# Altium PCB NDS_TV_OUT_PCB_V1I2.PcbDoc (part 1 of 2)
Units mm, origin at the board's own origin, x right, y up, seen from the top; angles counter-clockwise.
Board outline 38 x 49 mm, 4 copper layers (L1, L2-GND, L3-PW, L4), stack 0.603 mm thick; 44 components, 33 nets, 151 pads, 52 vias.
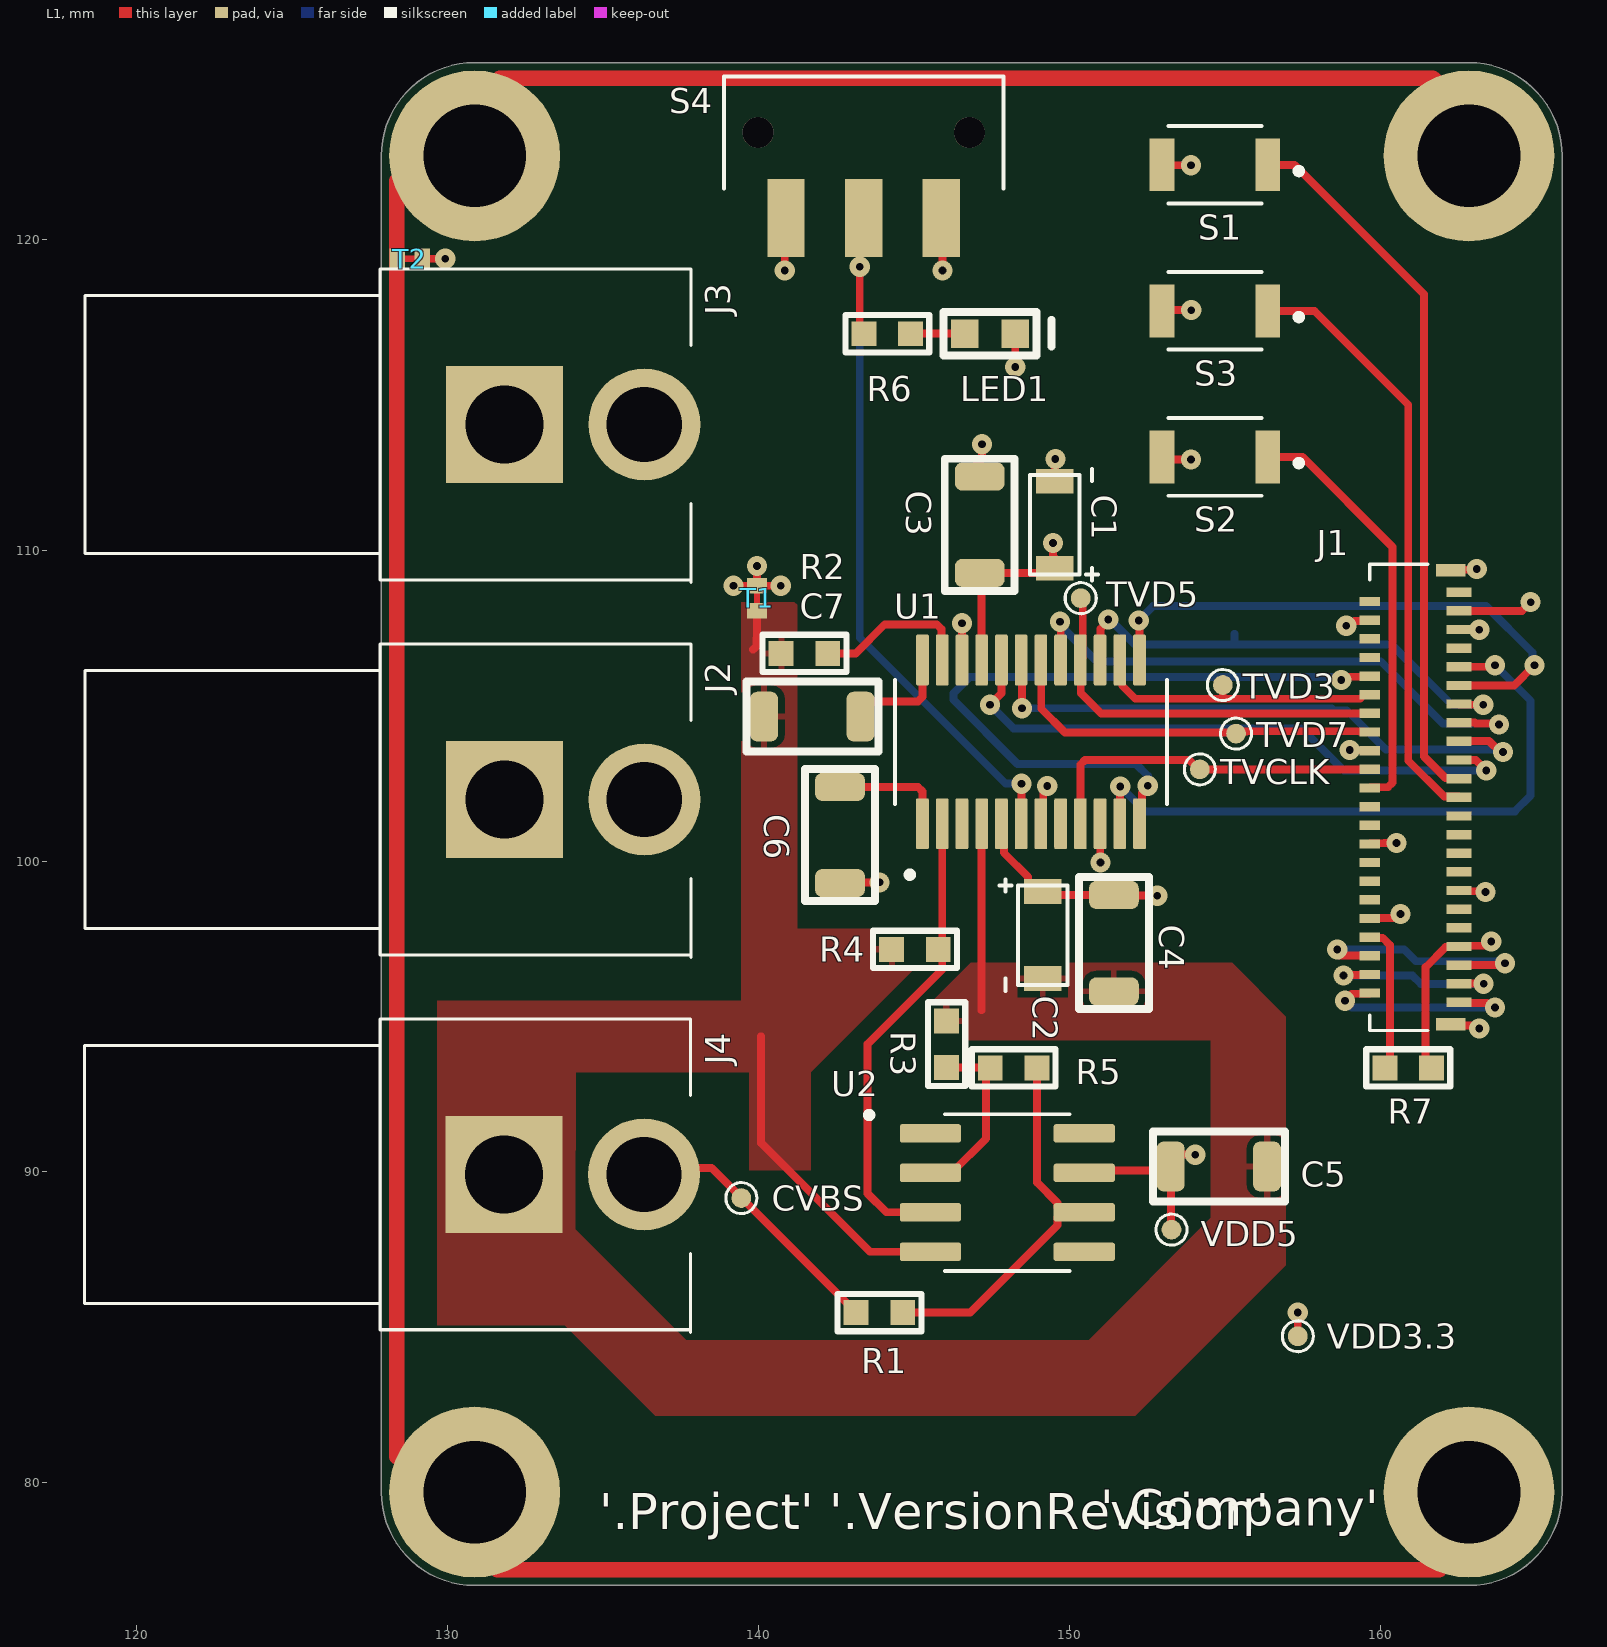
[diagram p0: L1 view]
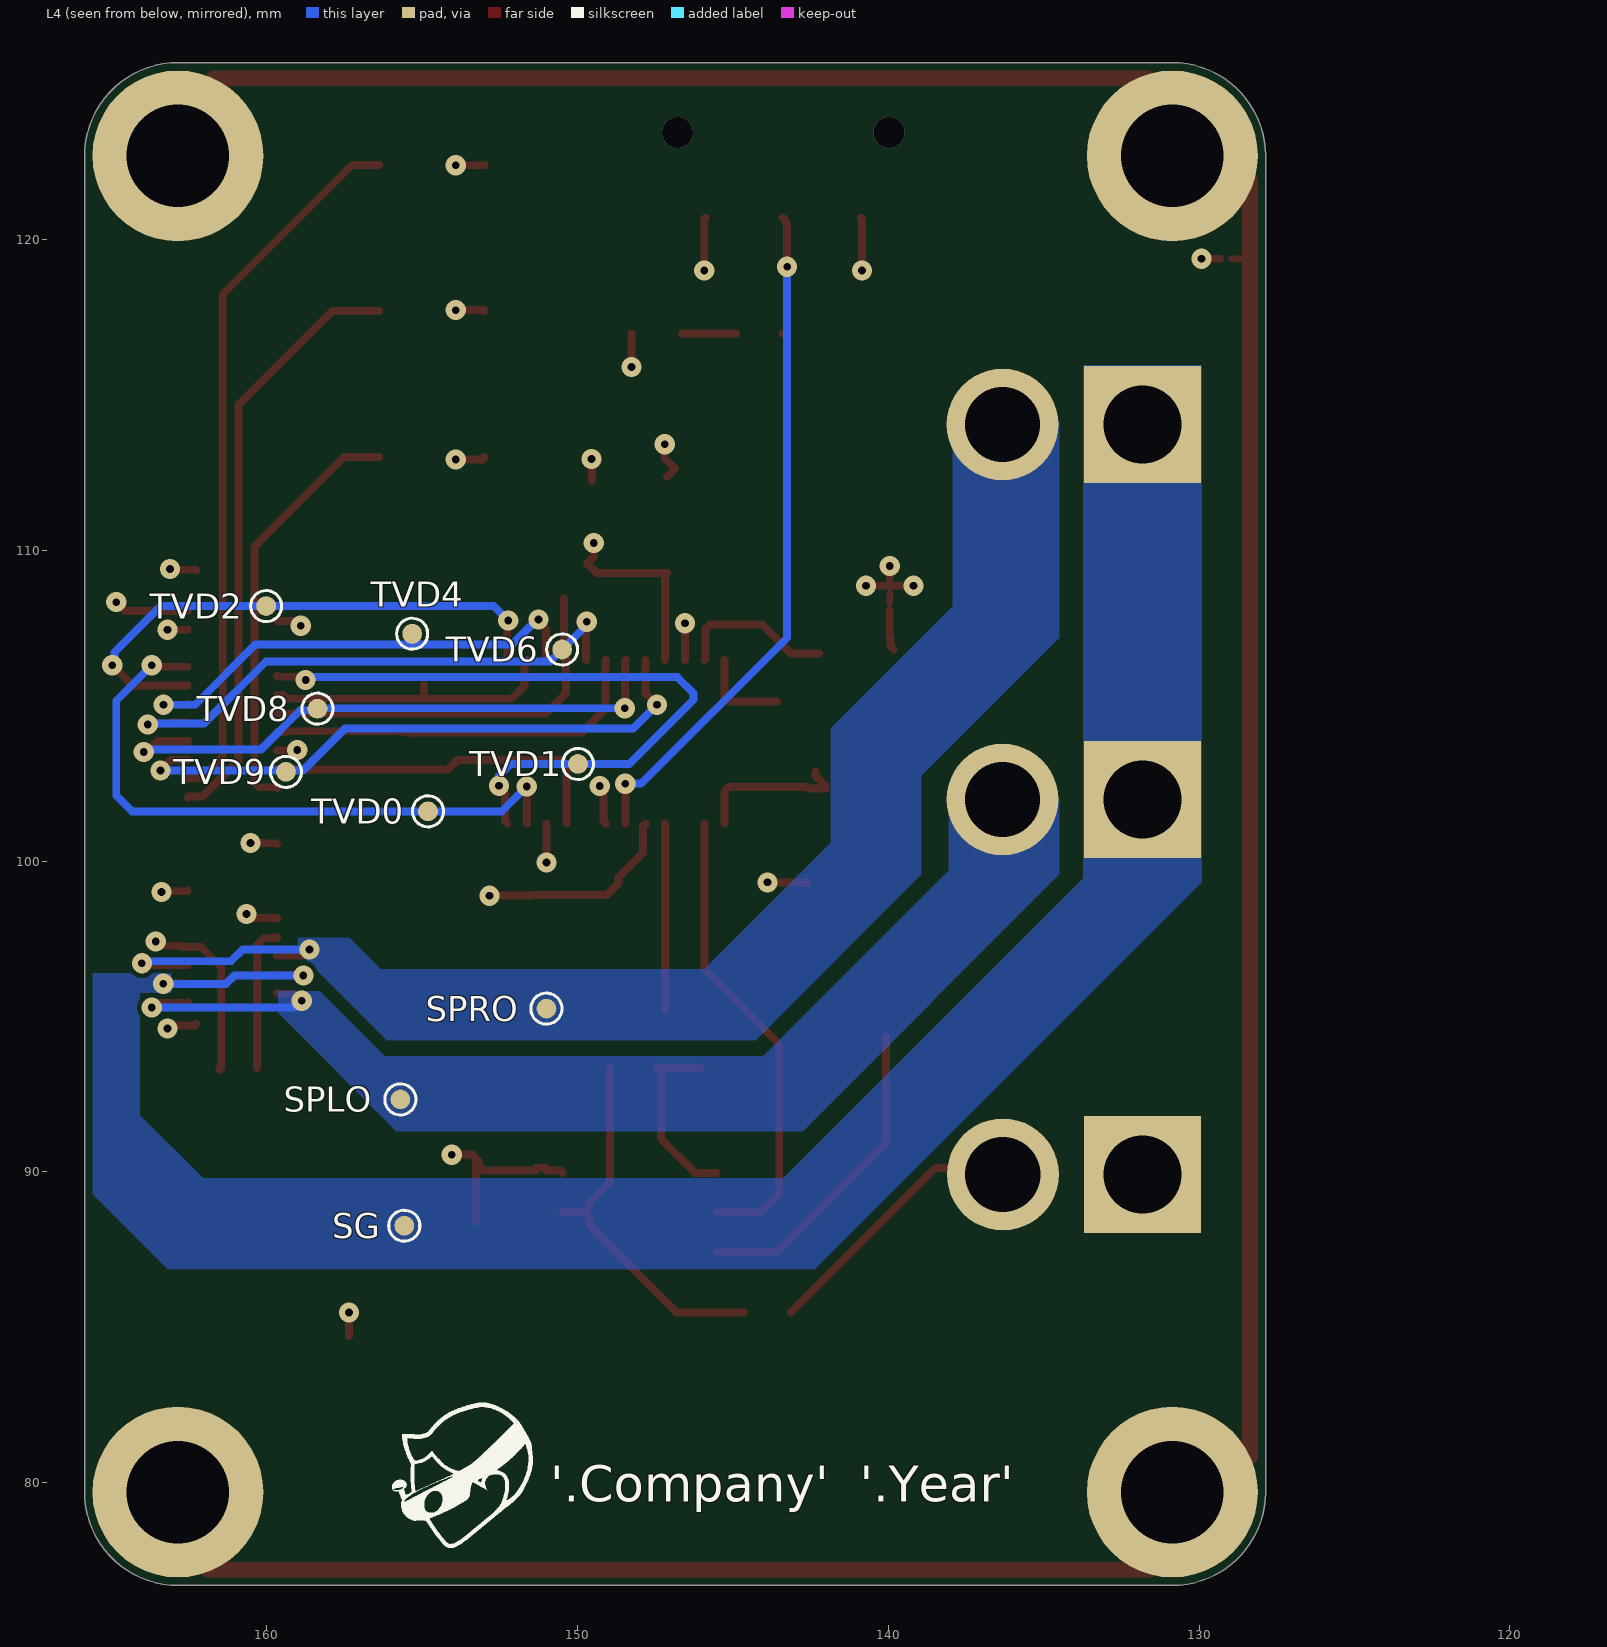
[diagram p1: L4 view, seen from below]
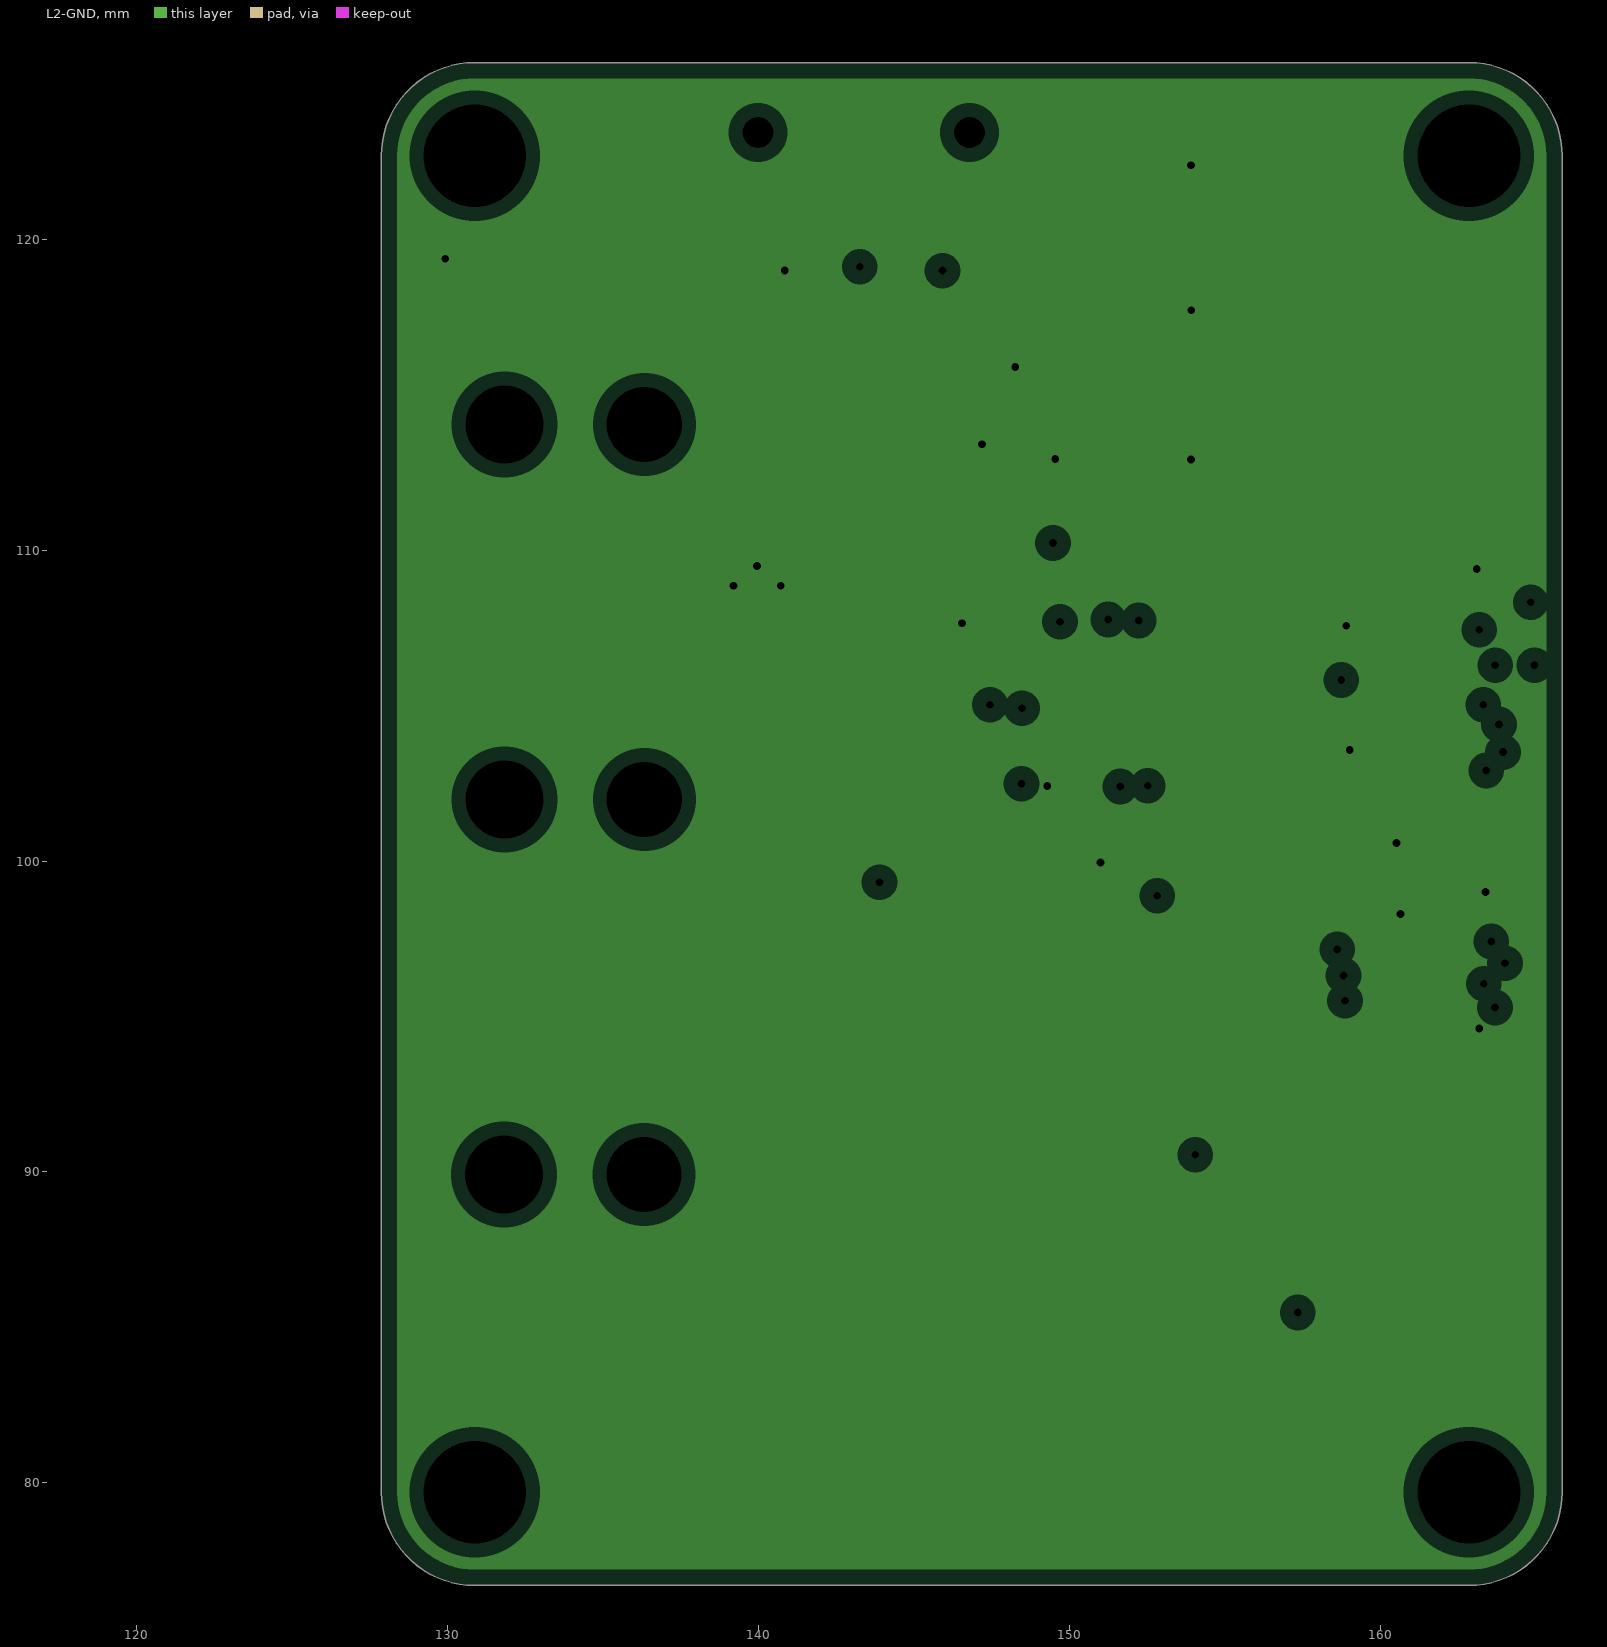
[diagram p2: L2-GND, clearances drawn from the general rule]
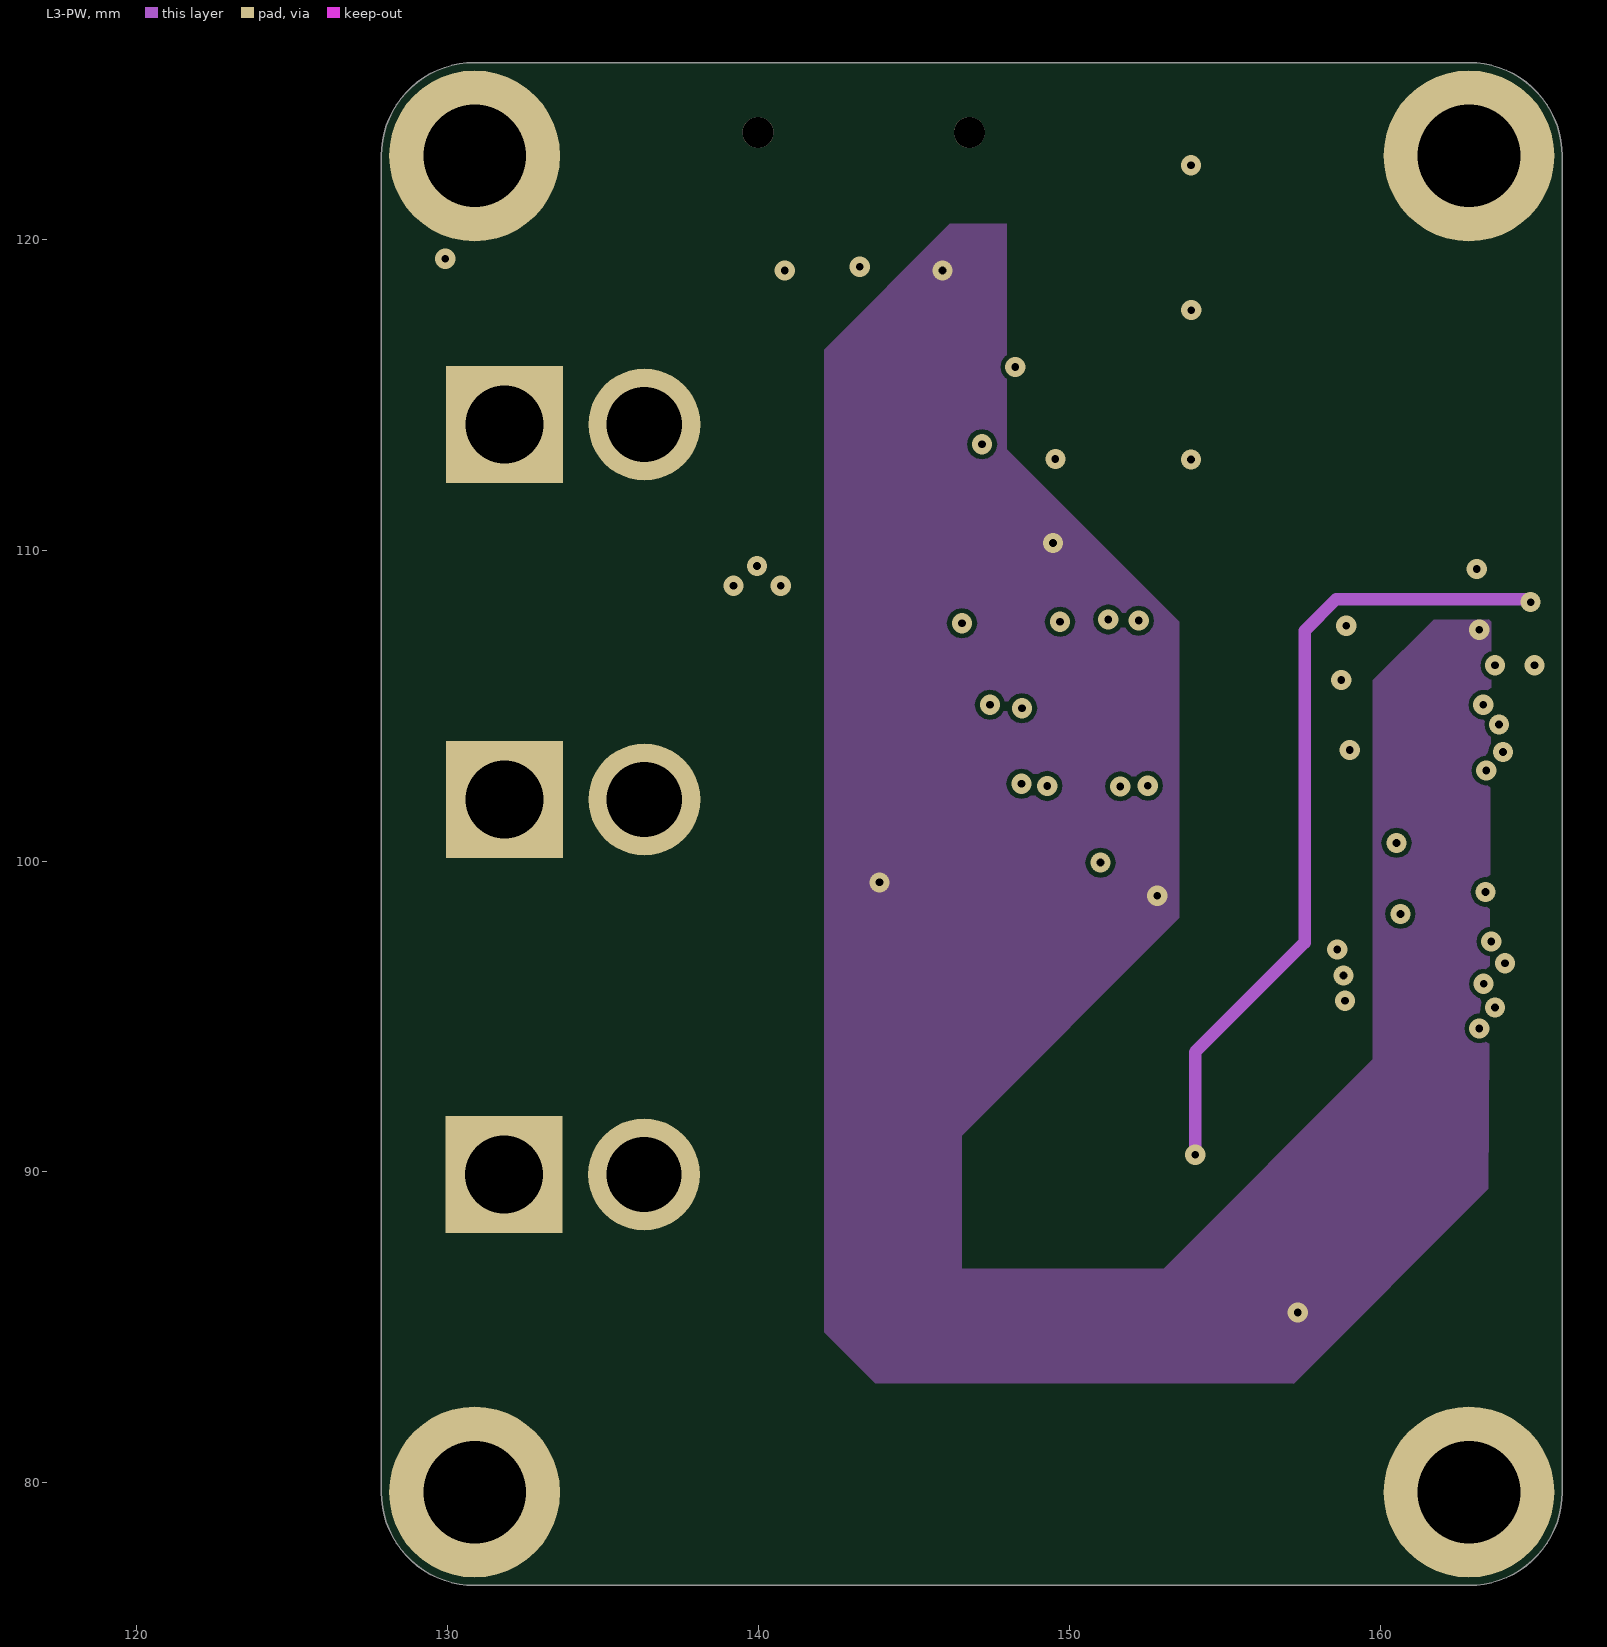
[diagram p3: L3-PW]

## Layer stack, top to bottom
Top Solder: solder mask 0.0102, Solder Resist, Dk 3.5
L1: signal copper 0.0356
Dielectric 1: prepreg 0.0711, PP-006, Dk 4.1
L2-GND: plane copper 0.035, net GND
Dielectric1: dielectric 0.32, FR-4, Dk 4.8
L3-PW: signal copper 0.035
Dielectric 2: prepreg 0.0711, PP-006, Dk 4.1
L4: signal copper 0.0356
Bottom Solder: solder mask 0.0102, Solder Resist, Dk 3.5

## Board outline
127.862,79.692 ccw(c130.862,79.692) 130.862,76.692 162.862,76.692 ccw(c162.862,79.692) 165.862,79.692 165.862,122.692 ccw(c162.862,122.692) 162.862,125.692 130.862,125.692 ccw(c130.862,122.692) 127.862,122.692

## Design rules (kind name [scope] priority, off if disabled: settings)
BoardOutlineClearance [All] p1: gap=0.25 ignorepadtopadclearanceinfootprint=FALSE except(0: Arc-SplitContinuation Track-SplitContinuation SMDPad-SplitContinuation THPad-SplitContinuation Via-SplitContinuation Fill-SplitContinuation Poly-SplitContinuation Region-SplitContinuation Text-SplitContinuation)
Clearance "Clearance poly Power Polygon" [OnLayer('L4-PWR') vs InPolygon] p1: gap=0.4 ignorepadtopadclearanceinfootprint=FALSE
Clearance Clearance-xPP-xTP-xTT [All] p2: gap=0.15 ignorepadtopadclearanceinfootprint=FALSE
ComponentClearance [All] p1: gap=0 collisioncheckmode=3 verticalgap=0 showdistances=FALSE
DiffPairsRouting DiffPairsRoutingGBE [InDifferentialPairClass('All Differential Pairs')] p1: maxlimit=0.22 minlimit=0.22 mostfreqgap=0.22 toplayer_minwidth=0.15 toplayer_maxwidth=0.15 toplayer_prefwidth=0.15 midlayer1_minwidth=0.15 midlayer1_maxwidth=0.15 midlayer1_prefwidth=0.15 bottomlayer_minwidth=0.15 bottomlayer_maxwidth=0.15 bottomlayer_prefwidth=0.15 maxuncoupledlength=1.25
Height [All] p1: minheight=0 maxheight=25 prefheight=12.5
HoleSize HoleSize-PTH [All] p1: absolutevalues=TRUE maxlimit=4 minlimit=0.15 maxpercent=80.000 minpercent=20.000
HoleToHoleClearance [All] p1: gap=0.35 allowstackedmicrovias=TRUE
MatchedLengths MatchedLengths_USB_DiffPairs_1 [InxSignalClass('USB_CHJ1_1_DL') OR InxSignalClass('USB_CHJ1_1_RX') OR InxSignalClass('USB_CHJ1_1_TX')] p1: tolerance=0.127 checknetsindiffpair=TRUE checkdiffpairvsdiffpair=FALSE checkxsignals=FALSE checkothers=FALSE
MatchedLengths MatchedLengths_USB_DiffPairs [InxSignalClass('USB_CHJ1_1_DL') OR InxSignalClass('USB_CHJ1_1_RX') OR InxSignalClass('USB_CHJ1_1_TX')] p2: tolerance=0.127 checknetsindiffpair=TRUE checkdiffpairvsdiffpair=FALSE checkxsignals=FALSE checkothers=FALSE
MatchedLengths DiffPairClass [InDifferentialPairClass('All Differential Pairs')] p3: tolerance=0.127 checknetsindiffpair=TRUE checkdiffpairvsdiffpair=FALSE checkxsignals=FALSE checkothers=FALSE
MatchedLengths MatchedLengths_GBE0 [InNetClass('GBE0')] p4: tolerance=0.127 checknetsindiffpair=FALSE checkdiffpairvsdiffpair=TRUE checkxsignals=TRUE checkothers=TRUE
MatchedLengths MatchedLengths_GBE1 [InNetClass('GBE1')] p5: tolerance=0.127 checknetsindiffpair=FALSE checkdiffpairvsdiffpair=TRUE checkxsignals=TRUE checkothers=TRUE
MatchedLengths MatchedLengths_GBE2 [InNetClass('GBE2')] p6: tolerance=0.127 checknetsindiffpair=FALSE checkdiffpairvsdiffpair=TRUE checkxsignals=TRUE checkothers=TRUE
MatchedLengths MatchedLengths_HDMI [InNetClass('HDMI')] p7: tolerance=0.127 checknetsindiffpair=FALSE checkdiffpairvsdiffpair=TRUE checkxsignals=TRUE checkothers=TRUE
MatchedLengths MatchedLengths_USB-GBE [InNetClass('USB-GBE')] p8: tolerance=0.127 checknetsindiffpair=FALSE checkdiffpairvsdiffpair=TRUE checkxsignals=TRUE checkothers=TRUE
MatchedLengths MatchedLengths_USB3 [InNetClass('USB3')] p9: tolerance=0.127 checknetsindiffpair=FALSE checkdiffpairvsdiffpair=TRUE checkxsignals=TRUE checkothers=TRUE
MatchedLengths MatchedLengths_USB2 [InNetClass('USB2')] p10: tolerance=0.127 checknetsindiffpair=FALSE checkdiffpairvsdiffpair=TRUE checkxsignals=TRUE checkothers=TRUE
MinimumAnnularRing "Minimum IAR  >0.45mm" [((ObjectKind = 'Pad') OR (ObjectKind = 'Via')) And (Layer = 'MultiLayer') And (HoleDiameter > AsMM(0.45))] p1: minimumring=0.175 // minimum inner annular ring for pads > 0.45mm finished hole size
MinimumAnnularRing "Minimum IAR <=0.45mm" [((ObjectKind = 'Pad') OR (ObjectKind = 'Via')) And (Layer = 'MultiLayer') And (HoleDiameter <= AsMM(0.45))] p2: minimumring=0.175 // minimum inner annular ring for pads <= 0.45mm finished hole size
MinimumSolderMaskSliver [All] p1: minsoldermaskwidth=0.08
PlaneClearance PlaneClearance-IPI [All] p1: clearance=0.45
PlaneConnect PlaneConnect_PWR [InNetClass('PWR')] p1: planeconnectstyle=Direct reliefexpansion=0.175 reliefentries=2 reliefconductorwidth=0.2 reliefairgap=0.2
PlaneConnect PlaneConnect_VIA [IsVia] p2: planeconnectstyle=Direct reliefexpansion=0.175 reliefentries=4 reliefconductorwidth=0.2 reliefairgap=0.2
PlaneConnect [All] p3: planeconnectstyle=Relief reliefexpansion=0.2 reliefentries=4 reliefconductorwidth=0.25 reliefairgap=0.2
PolygonConnect PolygonConnect_VIA [HasFootprint('NET_TIE')] p1: connectstyle=Direct reliefconductorwidth=0.2 reliefentries=4 polygonreliefangle="90 Angle" airgapwidth=0.2
PolygonConnect PolygonConnect_SMD [Not HasFootprint('NET_TIE') and InNet('AGND')] p2: thpad.connectstyle=Direct thpad.reliefconductorwidth=0.2 thpad.reliefentries=4 thpad.polygonreliefangle="90 Angle" thpad.airgapwidth=0.2 smdpad.connectstyle=Relief smdpad.reliefconductorwidth=0.2 smdpad.reliefentries=4 smdpad.polygonreliefangle="90 Angle" smdpad.airgapwidth=0.2 via.connectstyle=Direct via.reliefconductorwidth=0.2 via.reliefentries=4 via.polygonreliefangle="90 Angle" via.airgapwidth=0.2
PolygonConnect PolygonConnect_VIA_1 [All] p3: connectstyle=Direct reliefconductorwidth=0.2 reliefentries=4 polygonreliefangle="90 Angle" airgapwidth=0.2
PolygonConnect [All] p4: connectstyle=Relief reliefconductorwidth=0.25 reliefentries=4 polygonreliefangle="90 Angle" airgapwidth=0.2
RoutingCorners [All] p1: cornerstyle=45-Degree minsetback=2.5 maxsetback=2.5
RoutingVias "RoutingVias > 0.45mm" [(ObjectKind = 'Via') And (HoleDiameter > AsMM(0.45))] p1: holewidth=0.5 width=0.85 viastyle="Through Hole" minholewidth=0.5 minwidth=0.85 maxholewidth=0.9 maxwidth=1.25 // finishet hole size > 0.45mm
RoutingVias "RoutingVias <= 0.45mm" [(ObjectKind = 'Via') And (HoleDiameter <= AsMM(0.45))] p2: holewidth=0.2 width=0.55 viastyle="Through Hole" minholewidth=0.15 minwidth=0.5 maxholewidth=0.45 maxwidth=0.8 // finishet hole size <= 0.45mm
SilkToSilkClearance [All] p1: silktosilkclearance=0.1
SilkToSolderMaskClearance SilkscreenOverComponentPads [IsPad] p1: minsilkscreentomaskgap=0.1 clearancetoexposedcopper=TRUE
SolderMaskExpansion [All] p1: expansion=0 istentingtop=FALSE
UnRoutedNet [All] p1: checkbadconnections=TRUE
Width Width-xTW [All] p1: maxlimit=5 minlimit=0.125 preferedwidth=0.15
Width Width-GigaE [All] p2: maxlimit=0.15 minlimit=0.15 preferedwidth=0.15
Width Width-Power [InNetClass('PWR')] p3: maxlimit=5 minlimit=0.2 preferedwidth=0.25
18 further rules are at their usual default settings.

## Classes and differential pairs
component class "[05] - BUTTONS AND SWITCHES": LED1 R7 S1 S2 S3 S4
component class "[04] - CONNECTORS": J1 J2 J3 J4 SG SPLO SPRO T1 T2 TVCLK TVD0 TVD1 TVD2 TVD3 TVD4 TVD5 TVD6 TVD7 TVD8 TVD9 VDD3.3 VDD5
component class "[03] - DAC": C1 C2 C3 C4 C7 CVBS R3 U1 U2

## Components (designator, comment, footprint, x,y, rotation, side; value= is the part's Value field where it differs from the comment)
C1 "10uF" C1206T 150.33,109.223 r90 top
C2 "10uF" C1206T 148.349,99.215 r270 top
C3 "0.1uF" C1206 147.117,110.82 r270 top
C4 "0.1uF" C1206 151.435,97.358 r90 top
C5 "0.1uF" C1206 154.813,90.17 r180 top
C6 "0.1uF" C1206 142.621,100.838 r90 top
C7 "0.1uF" C1206 141.732,104.648 r0 top
CVBS "TP_25MILC" TP_25C 139.446,89.154 r90 top
J1 "4-2328724-5" 423287245 161.106,102.051 r90 top
J2 "KLPX-0848A-2-W" KLPX0848A2W 131.826,101.981 r0 top
J3 "KLPX-0848A-2-R" KLPX0848A2R 131.826,114.046 r0 top
J4 "KLPX-0848A-2-Y" KLPX0848A2Y 131.815,89.916 r0 top
LED1 "APTD1608LZGCK" RESC0603X55N 147.447,116.967 r180 top
R1 "75R" R0603 143.891,85.471 r180 top
R2 "DNP" R0603 141.478,106.68 r0 top
R3 "430R" R0603 146.05,94.107 r270 top
R4 "DNP" R0603 145.034,97.155 r0 top
R5 "1K" R0603 148.209,93.345 r0 top
R6 "320R" R0603 144.145,116.967 r180 top
R7 "1K" R0603 160.909,93.345 r0 top
S1 "B3U-1000P" SW_B3U-1000P 154.686,122.404 r180 top
S2 "B3U-1000P" SW_B3U-1000P 154.686,113.006 r180 top
S3 "B3U-1000P" SW_B3U-1000P 154.686,117.705 r180 top
S4 "JS102011SAQN" SW_JS102011SAQN 143.383,123.444 r180 top
SG "TP_25MILC" TP_25C 155.575,88.265 r90 bottom
SPLO "TP_25MILC" TP_25C 155.702,92.329 r90 bottom
SPRO "TP_25MILC" TP_25C 151.003,95.25 r90 bottom
T1 "NET TIE" NET_TIE 139.954,108.458 r90 top net-tie
T2 "NET TIE" NET_TIE 128.778,119.38 r0 top net-tie
TVCLK "TP_25MILC" TP_25C 154.2,102.951 r90 top
TVD0 "TP_25MILC" TP_25C 154.813,101.6 r90 bottom
TVD1 "TP_25MILC" TP_25C 149.987,103.124 r90 bottom
TVD2 "TP_25MILC" TP_25C 160.02,108.204 r90 bottom
TVD3 "TP_25MILC" TP_25C 154.94,105.664 r90 top
TVD4 "TP_25MILC" TP_25C 155.321,107.315 r90 bottom
TVD5 "TP_25MILC" TP_25C 150.368,108.458 r90 top
TVD6 "TP_25MILC" TP_25C 150.495,106.807 r90 bottom
TVD7 "TP_25MILC" TP_25C 155.366,104.1 r90 top
TVD8 "TP_25MILC" TP_25C 158.369,104.902 r90 bottom
TVD9 "TP_25MILC" TP_25C 159.385,102.87 r90 bottom
U1 "MAX5184BEEG+" SOP63P602X175-24N 148.768,103.835 r90 top
U2 "MAX4414ESA+" SOIC127P600X175-8N 148.006,89.332 r0 top
VDD3.3 "TP_25MILC" TP_25C 157.353,84.709 r90 top
VDD5 "TP_25MILC" TP_25C 153.289,88.138 r90 top

## Footprints (in the part's own frame and the unit in brackets; to place one, negate y for a bottom-side part, rotate by r counter-clockwise, add the part's x,y. Pads: shape width x height; smd on the part's side, far side on the other; paste and mask are expansions set on the pad)
423287245 [mm]
  rect 0.3x0.8 smd: 1(-6.6,-1.438) 3(-6,-1.438) 5(-5.4,-1.438) 7(-4.8,-1.438) 9(-4.2,-1.438) 11(-3.6,-1.438) 13(-3,-1.438) 15(-2.4,-1.438) 17(-1.8,-1.438) 19(-1.2,-1.438) 21(-0.6,-1.438) 23(0,-1.438) 25(0.6,-1.438) 27(1.2,-1.438) 29(1.8,-1.438) 31(2.4,-1.438) 33(3,-1.438) 35(3.6,-1.438) 37(4.2,-1.438) 39(4.8,-1.438) 41(5.4,-1.438) 43(6,-1.438) 45(6.6,-1.438)
  rect 0.3x0.65 smd: 2(-6.3,1.438) 4(-5.7,1.438) 6(-5.1,1.438) 8(-4.5,1.438) 10(-3.9,1.438) 12(-3.3,1.438) 14(-2.7,1.438) 16(-2.1,1.438) 18(-1.5,1.438) 20(-0.9,1.438) 22(-0.3,1.438) 24(0.3,1.438) 26(0.9,1.438) 28(1.5,1.438) 30(2.1,1.438) 32(2.7,1.438) 34(3.3,1.438) 36(3.9,1.438) 38(4.5,1.438) 40(5.1,1.438) 42(5.7,1.438) 44(6.3,1.438)
  rect 0.4x0.95 smd: 46(-7.3,-1.163) 47(7.3,-1.163)
  silkscreen extent -7.5,-0.44 7.5,1.44, body extent -7.5,-1.9 7.5,1.58, height 1
C1206 [mm]
  rrect50% 0.9x1.6 smd: 1(-1.55,0) 2(1.55,0)
  silkscreen extent -2.12,-1.12 2.12,1.12, body extent -1.6,-0.8 1.6,0.8, height 1
C1206T [mm]
  rect 0.8x1.2 smd: 1(0.2,0.8) 2(3,0.8)
  silkscreen extent -0.2,-0.6 3.4,1.6, body extent 0,0.03 3.2,1.63, height 1.8
KLPX0848A2R [mm]
  rect 3.765x3.765 hole 2.51: 1(0,0)
  round 3.6 hole 2.42: 2(4.5,0)
  silkscreen extent -13.5,-5.08 6,5, body extent -13.57,-5 6.03,5, height 13
KLPX0848A2W [mm]
  rect 3.765x3.765 hole 2.51: 1(0,0)
  round 3.6 hole 2.42: 2(4.5,0)
  silkscreen extent -13.5,-5.08 6,5, body extent -13.57,-5 6.03,5, height 13.06
KLPX0848A2Y [mm]
  rect 3.765x3.765 hole 2.51: 1(0,0)
  round 3.6 hole 2.42: 2(4.5,0)
  silkscreen extent -13.5,-5.08 6,5, body extent -13.56,-5 6.04,5, height 13
NET_TIE [mm]
  rect 0.5x0.65 smd paste-1 mask+0.102: 1(-0.4,0) 2(0.4,0)
  L1 lines w0.2: -0.175,0 0.175,0
R0603 [mm]
  rect 0.8x0.8 smd: 1(-0.75,0) 2(0.75,0)
  silkscreen extent -1.35,-0.6 1.35,0.6, body extent -0.8,-0.42 0.8,0.44, height 0.95
RESC0603X55N [mm]
  rect 0.89x0.93 smd: 1(-0.814,0) 2(0.814,0)
  silkscreen extent -1.97,-0.7 1.5,0.7, body extent -0.8,-0.4 0.8,0.4, height 0.95
SOIC127P600X175-8N [mm]
  rrect25% 1.97x0.59 smd: 1(-2.475,1.905) 2(-2.475,0.635) 3(-2.475,-0.635) 4(-2.475,-1.905) 5(2.475,-1.905) 6(2.475,-0.635) 7(2.475,0.635) 8(2.475,1.905)
  silkscreen extent -4.54,-2.52 2,2.59, body extent -3.08,-2.44 2.92,2.46, height 1.75
SOP63P602X175-24N [mm]
  rrect25% 1.64x0.41 smd: 1(-2.635,3.492) 2(-2.635,2.857) 3(-2.635,2.222) 4(-2.635,1.587) 5(-2.635,0.952) 6(-2.635,0.317) 7(-2.635,-0.318) 8(-2.635,-0.953) 9(-2.635,-1.588) 10(-2.635,-2.222) 11(-2.635,-2.857) 12(-2.635,-3.492) 13(2.635,-3.492) 14(2.635,-2.857) 15(2.635,-2.222) 16(2.635,-1.587) 17(2.635,-0.952) 18(2.635,-0.317) 19(2.635,0.318) 20(2.635,0.953) 21(2.635,1.588) 22(2.635,2.222) 23(2.635,2.857) 24(2.635,3.492)
  silkscreen extent -4.37,-4.37 1.99,4.37, body extent -2.97,-4.33 3.05,4.32, height 1.75
SW_B3U-1000P [mm]
  rect 0.8x1.7 smd: 1(-1.7,0) 2(1.7,0)
  silkscreen extent -2.8,-1.25 1.5,1.25, body extent -2.02,-1.27 1.98,1.23, height 1.75
SW_JS102011SAQN [mm]
  rect 1.2x2.5 smd: 1(-2.5,2.75) 2(0,2.75) 3(2.5,2.75)
  round 1 hole 1 unplated: ""(-3.4,0) ""(3.4,0)
  silkscreen extent -4.5,-1.8 4.5,1.8, body extent -4.5,-3.81 4.5,3.69, height 3.52
TP_25C [mm]
  round 0.635 smd paste-0.635 mask+0.051: 1(0,0)
  silkscreen extent -0.5,-0.5 0.5,0.5

## Part data
C1 C2: library part T491A106K010AT, "CAPACITOR, CASE A, 10UF, 10V; Product Range:KEMET - T491 Series; Capacitance:10µF; Capacitance Tolerance:± 10%; Voltage Rating:10V; Capacitor Case Style:1206 [3216 Metric]; Manufacturer Size Code:A; Operating Temperature Max:125°C; ;RoHS Compliant: Yes", Case Code (Imperial)=1206, Case Code (Metric)=3216, Dielectric Material=Tantalum, ESR (Equivalent Series Resistance)=4R, Leakage Current=1uA, Manufacturer=KEMET, Max Operating Temperature=125°C, Min Operating Temperature=-55°C, Package Quantity=2000, Ripple Current=137mA, Supplier Part Number 1=80-T491A106K010, Tolerance=10%, Voltage=10V, Capacitance=10uF, Case/Package=1206, Category="Tantalum Capacitors", ComponentLink1Description=https://datasheet.ciiva.com/257/kem-t2005-t491-257584.pdf?src-supplier=Digi-Key, ComponentLink1URL=https://datasheet.ciiva.com/257/kem-t2005-t491-257584.pdf?src-supplier=Digi-Key, ComponentLink2Description=https://datasheet.ciiva.com/11793/0900766b80718482-11793106.pdf?src-supplier=RSComponents, ComponentLink2URL=https://datasheet.ciiva.com/11793/0900766b80718482-11793106.pdf?src-supplier=RSComponents, ComponentLink3Description=https://datasheet.ciiva.com/7668/1732743-7668006.pdf?src-supplier=Element14, ComponentLink3URL=https://datasheet.ciiva.com/7668/1732743-7668006.pdf?src-supplier=Element14, ComponentLink4Description=https://datasheet.ciiva.com/20171/458293-da-en-01-20171903.pdf?src-supplier=Rapid+Electronics, ComponentLink4URL=https://datasheet.ciiva.com/20171/458293-da-en-01-20171903.pdf?src-supplier=Rapid+Electronics, ComponentLink5Description=https://datasheet.ciiva.com/27052/1573249-27052559.pdf?src-supplier=Jameco, ComponentLink5URL=https://datasheet.ciiva.com/27052/1573249-27052559.pdf?src-supplier=Jameco, ComponentLink6Description=https://datasheet.ciiva.com/257/kem-t2005-t491-257585.pdf?src-supplier=Digi-Key, ComponentLink6URL=https://datasheet.ciiva.com/257/kem-t2005-t491-257585.pdf?src-supplier=Digi-Key, ComponentLink7Description=https://datasheet.ciiva.com/257/kem-t2005-t491-257586.pdf?src-supplier=Digi-Key, ComponentLink7URL=https://datasheet.ciiva.com/257/kem-t2005-t491-257586.pdf?src-supplier=Digi-Key, ComponentLink8Description=https://datasheet.ciiva.com/7668/1854511-7668005.pdf?src-supplier=Element14, ComponentLink8URL=https://datasheet.ciiva.com/7668/1854511-7668005.pdf?src-supplier=Element14, ComponentLink9Description=https://datasheet.ciiva.com/7668/1854511-7668007.pdf?src-supplier=Element14, ComponentLink9URL=https://datasheet.ciiva.com/7668/1854511-7668007.pdf?src-supplier=Element14, ComponentLink10Description=https://datasheet.ciiva.com/7668/1446014-7668008.pdf?src-supplier=Element14, ComponentLink10URL=https://datasheet.ciiva.com/7668/1446014-7668008.pdf?src-supplier=Element14, ComponentLink11Description=https://datasheet.ciiva.com/12882/kem-t2005-t491-12882826.pdf?src-supplier=Mouser, ComponentLink11URL=https://datasheet.ciiva.com/12882/kem-t2005-t491-12882826.pdf?src-supplier=Mouser, ComponentLink12Description=https://datasheet.ciiva.com/7668/kem-t2005-t491-7668139.pdf?src-supplier=Element14, ComponentLink12URL=https://datasheet.ciiva.com/7668/kem-t2005-t491-7668139.pdf?src-supplier=Element14, ComponentLink13Description=https://datasheet.ciiva.com/14586/70095774-14586699.pdf?src-supplier=Allied+Electronics, ComponentLink13URL=https://datasheet.ciiva.com/14586/70095774-14586699.pdf?src-supplier=Allied+Electronics, ComponentLink14Description=https://datasheet.ciiva.com/14596/70095774-14596972.pdf?src-supplier=Allied+Electronics, ComponentLink14URL=https://datasheet.ciiva.com/14596/70095774-14596972.pdf?src-supplier=Allied+Electronics, ComponentLink15Description=https://datasheet.ciiva.com/29244/458293-da-01-en-kondensator-10uf-3216-10pr-10v-85c-29244583.pdf?src-supplier=Conrad, ComponentLink15URL=https://datasheet.ciiva.com/29244/458293-da-01-en-kondensator-10uf-3216-10pr-10v-85c-29244583.pdf?src-supplier=Conrad, Depth=1.6mm, Dissipation Factor=6%, Features="General Purpose", Height=1.6mm, Height - Seated (Max)=0.071inch, Lead Free="Lead Free", Length=3.2mm, Life (Hours)=2000Hour, Manufacturer Part Number=T491A106K010AT, Mount="Surface Mount,PCB", Packaging="Tape and Reel", Polarity=Polar, Pricing 1="1=0,33000, 10=0,16200, 50=0,16200, 100=0,13900, 1000=0,08800, 10000=0,06100 (USD)", REACH SVHC="No SVHC", RoHS=Yes, Supplier 1=Mouser, Termination=SMD/SMT, Voltage Rating=10V, Voltage Rating (DC)=10V, Width=0.063inch
C3 C4 C5 C6 C7: library part GRM319R71H104KA01D, "MURATA - GRM319R71H104KA01D - COND, CERÁ MULT, X7R, 100NF, 50V, 1206", Manufacturer=MURATA, Supplier Part Number 1=1828956, ComponentLink1Description=http://www.farnell.com/datasheets/2048709.pdf, ComponentLink1URL=http://www.farnell.com/datasheets/2048709.pdf, ComponentLink2Description=http://www.farnell.com/datasheets/2006461.pdf, ComponentLink2URL=http://www.farnell.com/datasheets/2006461.pdf, Manufacturer Part Number=GRM319R71H104KA01D, Pricing 1="10=0,0548, 100=0,0373, 500=0,0298, 1000=0,0271, 2000=0,0248, 4000=0,0231, 20000=0,0213, 40000=0,0209 (EUR)", RoHS=YES, Stock 1=24194, Supplier 1=Farnell, Supplier 2=Digi-Key, Supplier Part Number 2=490-1775-1-ND
CVBS SG SPLO SPRO TVCLK TVD0 TVD1 TVD2 TVD3 TVD4 TVD5 TVD6 TVD7 TVD8 TVD9 VDD3.3 VDD5: "Test Point 25mil"
J1: "FPC Connector; 0.3mm pitch front flip FPC; 45pos", Current Rating=500mA, Flammability Rating="UL94 V-0", Housing Color=Natural, Manufacturer="TE Connectivity AMP", Max Operating Temperature=85°C, Min Operating Temperature=-40°C, Supplier Part Number 1=2946027, Voltage Rating=30V, Actuator Material=Thermoplastic, Category="FFC / FPC", ComponentLink1Description=https://www.te.com/commerce/DocumentDelivery/DDEController?Action=srchrtrv&amp;DocNm=2328724&amp;DocType=Customer+Drawing&amp;DocLang=English&src-supplier=Digi-Key, ComponentLink1URL=https://www.te.com/commerce/DocumentDelivery/DDEController?Action=srchrtrv&amp;DocNm=2328724&amp;DocType=Customer+Drawing&amp;DocLang=English&src-supplier=Digi-Key, Contact Material="Copper Alloy", Contact Plating=Gold, Housing Material=Thermoplastic, Manufacturer Part Number=4-2328724-5, Mount="Surface Mount", Number of Positions=45, Packaging="Tape and Reel", Pricing 1="1=0,23000, 125=0,21700, 375=0,20400, 1000=0,19100, 2500=0,18700 (EUR)", RoHS=No, Stock 1=408, Supplier 1=Farnell, Termination=Solder
J2: "Conn RCA F 2 POS 4.5mm Solder RA Thru-Hole 2 Terminal 1 Port", Color=White, Manufacturer=Kycon, Package Quantity=500, Supplier Part Number 1=806-KLPX-0848A-2-W, Voltage Rating=500V, Category=Connectors, ComponentLink1Description=http://www.mouser.com/ds/2/222/KLPX-334830.pdf?src-supplier=Mouser, ComponentLink1URL=http://www.mouser.com/ds/2/222/KLPX-334830.pdf?src-supplier=Mouser, ComponentLink2Description=http://domino2.kycon.com/catalog_PDF/Standard%20Catalog%20page/RCA%20Phono%20Jacks/SKLPX.pdf?src-supplier=Avnet, ComponentLink2URL=http://domino2.kycon.com/catalog_PDF/Standard%20Catalog%20page/RCA%20Phono%20Jacks/SKLPX.pdf?src-supplier=Avnet, ComponentLink3Description=http://domino2.kycon.com/catalog_PDF/Standard%20Catalog%20page/RCA%20Phono%20Jacks/SKLPX.pdf?src-supplier=Avnet+Europe, ComponentLink3URL=http://domino2.kycon.com/catalog_PDF/Standard%20Catalog%20page/RCA%20Phono%20Jacks/SKLPX.pdf?src-supplier=Avnet+Europe, Contact Material=Brass, Contact Plating=Tin, Gender=Female, Manufacturer Part Number=KLPX-0848A-2-W, Mount="Through Hole", Number of Contacts=2, Number of Ports=1, Orientation="Right Angle", Packaging=Bag, Pitch=4.5mm, Pricing 1="1=0,78000, 10=0,61500, 50=0,61500, 100=0,53400, 1000=0,42700, 10000=0,34700 (USD)", Radiation Hardening=No, RoHS=Yes, Supplier 1=Mouser, Termination="Through Hole"
J3: "Conn RCA F 2 POS 4.5mm Solder RA Thru-Hole 2 Terminal 1 Port", Color=Red, Manufacturer=Kycon, Package Quantity=500, Supplier Part Number 1=806-KLPX-0848A-2-R, Voltage Rating=500V, Category=Connectors, ComponentLink1Description=http://www.mouser.com/ds/2/222/KLPX-334830.pdf?src-supplier=Mouser, ComponentLink1URL=http://www.mouser.com/ds/2/222/KLPX-334830.pdf?src-supplier=Mouser, ComponentLink2Description=http://domino2.kycon.com/catalog_PDF/Standard%20Catalog%20page/RCA%20Phono%20Jacks/SKLPX.pdf?src-supplier=Avnet, ComponentLink2URL=http://domino2.kycon.com/catalog_PDF/Standard%20Catalog%20page/RCA%20Phono%20Jacks/SKLPX.pdf?src-supplier=Avnet, ComponentLink3Description=http://domino2.kycon.com/catalog_PDF/Standard%20Catalog%20page/RCA%20Phono%20Jacks/SKLPX.pdf?src-supplier=Avnet+Europe, ComponentLink3URL=http://domino2.kycon.com/catalog_PDF/Standard%20Catalog%20page/RCA%20Phono%20Jacks/SKLPX.pdf?src-supplier=Avnet+Europe, Contact Material=Brass, Contact Plating=Tin, Gender=Female, Manufacturer Part Number=KLPX-0848A-2-R, Mount="Through Hole", Number of Contacts=2, Number of Ports=1, Orientation="Right Angle", Packaging=Bag, Pitch=4.5mm, Pricing 1="1=0,78000, 10=0,61500, 50=0,61500, 100=0,53400, 1000=0,42800, 10000=0,34800 (USD)", Radiation Hardening=No, RoHS=Yes, Stock 1=694, Supplier 1=Mouser, Termination="Through Hole"
J4: "Conn RCA F 2 POS 4.5mm Solder RA Thru-Hole 2 Terminal 1 Port", Color=Yellow, Manufacturer=Kycon, Package Quantity=500, Supplier Part Number 1=806-KLPX-0848A-2-Y, Voltage Rating=500V, Category=Connectors, ComponentLink1Description=https://datasheet.ciiva.com/12540/klpx-0848a-2-x-183296-12540000.pdf?src-supplier=Mouser, ComponentLink1URL=https://datasheet.ciiva.com/12540/klpx-0848a-2-x-183296-12540000.pdf?src-supplier=Mouser, Contact Material=Brass, Contact Plating=Tin, Gender=Female, Manufacturer Part Number=KLPX-0848A-2-Y, Mount="Through Hole", Number of Contacts=2, Number of Ports=1, Orientation="Right Angle", Packaging=Bag, Pitch=4.5mm, Pricing 1="1=0,78000, 10=0,61500, 50=0,61500, 100=0,53400, 1000=0,42700, 10000=0,34700 (USD)", Radiation Hardening=No, RoHS=Yes, Stock 1=528, Supplier 1=Mouser, Termination="Through Hole"
LED1: "LED GREEN CLEAR 0603 SMD", Case Code (Imperial)=0603, Case Code (Metric)=1608, Color=Green, Forward Voltage=2.65V, Lens Color=Colorless, Manufacturer=Kingbright, Supplier Part Number 1=604-APTD1608LZGCK, Test Current=2mA, Case/Package=0603, Category=LEDs, ComponentLink1Description=http://www.mouser.com/ds/2/216/APTD1608LZGCK-535846.pdf?src-supplier=Mouser, ComponentLink1URL=http://www.mouser.com/ds/2/216/APTD1608LZGCK-535846.pdf?src-supplier=Mouser, ComponentLink2Description=http://www.kingbrightusa.com/images/catalog/SPEC/APTD1608LZGCK.pdf?src-supplier=Digi-Key, ComponentLink2URL=http://www.kingbrightusa.com/images/catalog/SPEC/APTD1608LZGCK.pdf?src-supplier=Digi-Key, Dominant Wavelength=525nm, Height=0.95mm, Length=1.6mm, Lens Transparency=Clear, Luminous Intensity=90mcd, Manufacturer Part Number=APTD1608LZGCK, Mount="Surface Mount", Packaging="Cut Tape", Pricing 1="1=0,56000, 10=0,36300, 50=0,36300, 100=0,31700, 1000=0,21000, 10000=0,17900 (USD)", RoHS=Yes, Stock 1=24112, Supplier 1=Mouser, Viewing Angle=60°, Width=0.8mm
R1: library part CRCW060375R0FKEA, "VISHAY - CRCW060375R0FKEA - RES, 75R, 1%, 0.1W, 0603, THICK FILM", Case Code (Imperial)=0603, Case Code (Metric)=1608, Manufacturer=Vishay, Max Operating Temperature=155°C, Min Operating Temperature=-55°C, Package Quantity=5000, Power Rating=100mW, Resistor Type="Thick Film", Supplier Part Number 1=71-CRCW0603-75-E3, Temperature Coefficient=100ppm/°C, Tolerance=1%, Voltage Rating=75V, Case/Package=0603, Category="Chip SMD Resistors", ComponentLink1Description=https://datasheet.ciiva.com/11809/0900766b80d98afc-11809100.pdf?src-supplier=RSComponents, ComponentLink1URL=https://datasheet.ciiva.com/11809/0900766b80d98afc-11809100.pdf?src-supplier=RSComponents, ComponentLink2Description=https://datasheet.ciiva.com/16199/dcrcwe3-16199141.pdf?src-supplier=Future+Electronics, ComponentLink2URL=https://datasheet.ciiva.com/16199/dcrcwe3-16199141.pdf?src-supplier=Future+Electronics, ComponentLink3Description=https://datasheet.ciiva.com/5541/dcrcwe3-109170-5541910.pdf?src-supplier=Mouser, ComponentLink3URL=https://datasheet.ciiva.com/5541/dcrcwe3-109170-5541910.pdf?src-supplier=Mouser, ComponentLink4Description=https://datasheet.ciiva.com/16722/70201119-16722522.pdf?src-supplier=Allied+Electronics, ComponentLink4URL=https://datasheet.ciiva.com/16722/70201119-16722522.pdf?src-supplier=Allied+Electronics, ComponentLink5Description=https://datasheet.ciiva.com/7673/1697337-7673323.pdf?src-supplier=Element14, ComponentLink5URL=https://datasheet.ciiva.com/7673/1697337-7673323.pdf?src-supplier=Element14, ComponentLink6Description=https://datasheet.ciiva.com/16852/dcrcwe3-16852747.pdf?src-supplier=Avnet+Europe, ComponentLink6URL=https://datasheet.ciiva.com/16852/dcrcwe3-16852747.pdf?src-supplier=Avnet+Europe, ComponentLink7Description=https://datasheet.ciiva.com/3257/dcrcwe3-3257884.pdf?src-supplier=Avnet, ComponentLink7URL=https://datasheet.ciiva.com/3257/dcrcwe3-3257884.pdf?src-supplier=Avnet, ComponentLink8Description=https://datasheet.ciiva.com/3257/dcrcwe3-3257885.pdf?src-supplier=Avnet, ComponentLink8URL=https://datasheet.ciiva.com/3257/dcrcwe3-3257885.pdf?src-supplier=Avnet, ComponentLink9Description=https://datasheet.ciiva.com/16780/70201119-16780254.pdf?src-supplier=Allied+Electronics, ComponentLink9URL=https://datasheet.ciiva.com/16780/70201119-16780254.pdf?src-supplier=Allied+Electronics, ComponentLink10Description=https://datasheet.ciiva.com/7673/1697337-7673471.pdf?src-supplier=Element14, ComponentLink10URL=https://datasheet.ciiva.com/7673/1697337-7673471.pdf?src-supplier=Element14, Contact Plating=Tin, Depth=0.85mm, Height=0.45mm, Lead Free="Lead Free", Length=1.55mm, Manufacturer Part Number=CRCW060375R0FKEA, Military Standard=Not, Number of Terminations=2, Packaging="Tape and Reel", Pricing 1="1=0,10000, 10=0,03100, 50=0,03100, 100=0,01300, 1000=0,00500, 10000=0,00500 (USD)", REACH SVHC=Unknown, Resistance=75R, RoHS=Yes, Stock 1=107137, Supplier 1=Mouser, Termination=SMD/SMT, Voltage Rating (DC)=75V, Weight=7.1E-05oz, Width=0.85mm, Working Voltage=75V
R2 R4: library part R0603
R3: library part MCWF06R4300BTL, "Res, 430R, 0.1%, 0.1W, 0603, Thin Film", Case Code (Imperial)=0603, Case Code (Metric)=1608, Manufacturer=Multicomp, Power Rating=100mW, Resistor Type="Thin Film", Supplier Part Number 1=2337178, Temperature Coefficient=25ppm/°C, Tolerance=0.1%, Voltage Rating=75V, ComponentLink1Description=http://www.farnell.com/datasheets/1729042.pdf?src-supplier=Element14, ComponentLink1URL=http://www.farnell.com/datasheets/1729042.pdf?src-supplier=Element14, ComponentLink2Description=http://www.farnell.com/datasheets/1729040.pdf?src-supplier=Element14, ComponentLink2URL=http://www.farnell.com/datasheets/1729040.pdf?src-supplier=Element14, Manufacturer Part Number=MCWF06R4300BTL, Packaging="Cut Tape", Pricing 1="10=0,10600, 100=0,06130, 500=0,04660, 1000=0,04090, 2500=0,03490, 5000=0,02950, 25000=0,02460, 50000=0,02090 (EUR)", REACH SVHC="No SVHC", Resistance=430R, RoHS=No, Stock 1=14065, Supplier 1=Farnell, Voltage Rating (DC)=75V
R5 R7: library part ESR03EZPF1001, "ROHM - ESR03EZPF1001 - SMD Chip Resistor, Anti-Surge, 0603 [1608 Metric], 1 kohm, ESR Series, 150 V, Thick Film, 250 mW", Case Code (Imperial)=0603, Case Code (Metric)=1608, Manufacturer=Rohm, Max Operating Temperature=155°C, Max Power Dissipation=250mW, Min Operating Temperature=-55°C, Package Quantity=1, Resistance=1kR, Resistor Type="Thick Film", Supplier Part Number 1=755-ESR03EZPF1001, Temperature Coefficient=100ppm/°C, Tolerance=1%, Case/Package=0603, Category="Chip SMD Resistors", ComponentLink1Description=https://datasheet.ciiva.com/2469/esr-2469712.pdf?src-supplier=Digi-Key, ComponentLink1URL=https://datasheet.ciiva.com/2469/esr-2469712.pdf?src-supplier=Digi-Key, ComponentLink2Description=https://datasheet.ciiva.com/2469/esr-2469713.pdf?src-supplier=Digi-Key, ComponentLink2URL=https://datasheet.ciiva.com/2469/esr-2469713.pdf?src-supplier=Digi-Key, ComponentLink3Description=https://datasheet.ciiva.com/2469/esr-2469714.pdf?src-supplier=Digi-Key, ComponentLink3URL=https://datasheet.ciiva.com/2469/esr-2469714.pdf?src-supplier=Digi-Key, Features="Automotive AEC-Q200", Height=0.022inch, Lead Free="Lead Free", Length=0.063inch, Manufacturer Part Number=ESR03EZPF1001, Number of Terminations=2, Packaging="Tape and Reel", Power Rating=250mW, Pricing 1="1=0,13000, 10=0,11100, 50=0,11100, 100=0,04400, 1000=0,01700, 10000=0,01100 (USD)", RoHS=Yes, Stock 1=87852, Supplier 1=Mouser, Width=0.031inch
R6: library part RT0603DRE07320RL, "High Precision-High Stability Chip Resistor Thin Film 0603 320Ohm 0.5% Paper T/R", Case/Package=0603, Manufacturer=Yageo, Max Operating Temperature=155°C, Max Power Dissipation=100mW, Min Operating Temperature=-55°C, Resistor Type="Thin Film", Supplier Part Number 1=603-RT0603DRE07320RL, Temperature Coefficient=50ppm/°C, Tolerance=0.5%, Category="Chip SMD Resistors", ComponentLink1Description=http://www.yageo.com/documents/recent/PYu-RT_1-to-0.01_RoHS_L_9.pdf?src-supplier=Digi-Key, ComponentLink1URL=http://www.yageo.com/documents/recent/PYu-RT_1-to-0.01_RoHS_L_9.pdf?src-supplier=Digi-Key, Manufacturer Part Number=RT0603DRE07320RL, Number of Terminations=2, Packaging="Tape and Reel", Pricing 1="1=0,14000, 10=0,07400, 50=0,07400, 100=0,02600, 1000=0,01900, 10000=0,01200 (USD)", Resistance=320R, RoHS=Yes, Stock 1=3704, Supplier 1=Mouser
S1 S2 S3: "SWITCH TACTILE SPST-NO 0.05A 12V", Contact Current Rating=50mA, Contact Resistance=100mR, Insulation Resistance=100MR, Manufacturer=Omron, Max Operating Temperature=70°C, Max Voltage Rating (DC)=12V, Min Operating Temperature=-25°C, Operating Force=1.5N, Package Quantity=1, Ratings="Dust Proof,IP40", Supplier Part Number 1=653-B3U-1000P, Actuator Length=0.4mm, Actuator Type=Standard, Category="Tactile Switches", ComponentLink1Description=https://datasheet.ciiva.com/26917/getdatasheetpartid-552554-26917552.pdf?src-supplier=Verical, ComponentLink1URL=https://datasheet.ciiva.com/26917/getdatasheetpartid-552554-26917552.pdf?src-supplier=Verical, ComponentLink2Description=https://datasheet.ciiva.com/22696/1685550-22696214.pdf?src-supplier=Element14, ComponentLink2URL=https://datasheet.ciiva.com/22696/1685550-22696214.pdf?src-supplier=Element14, ComponentLink3Description=https://datasheet.ciiva.com/1532/1685550-1532680.pdf?src-supplier=Element14, ComponentLink3URL=https://datasheet.ciiva.com/1532/1685550-1532680.pdf?src-supplier=Element14, ComponentLink4Description=https://datasheet.ciiva.com/1634/1685550-1634396.pdf?src-supplier=Farnell, ComponentLink4URL=https://datasheet.ciiva.com/1634/1685550-1634396.pdf?src-supplier=Farnell, ComponentLink5Description=https://datasheet.ciiva.com/14142/b3u-eng-datasheet-14142540.pdf?src-supplier=Distrelec, ComponentLink5URL=https://datasheet.ciiva.com/14142/b3u-eng-datasheet-14142540.pdf?src-supplier=Distrelec, ComponentLink6Description=https://datasheet.ciiva.com/2900/b3u-1110-2900029.pdf?src-supplier=Digi-Key, ComponentLink6URL=https://datasheet.ciiva.com/2900/b3u-1110-2900029.pdf?src-supplier=Digi-Key, ComponentLink7Description=https://datasheet.ciiva.com/16155/en-b3u-16155021.pdf?src-supplier=Onlinecomponents.com, ComponentLink7URL=https://datasheet.ciiva.com/16155/en-b3u-16155021.pdf?src-supplier=Onlinecomponents.com, ComponentLink8Description=https://datasheet.ciiva.com/2900/b3u-1110-2900030.pdf?src-supplier=Digi-Key, ComponentLink8URL=https://datasheet.ciiva.com/2900/b3u-1110-2900030.pdf?src-supplier=Digi-Key, ComponentLink9Description=https://datasheet.ciiva.com/16862/70176037-16862846.pdf?src-supplier=Allied+Electronics, ComponentLink9URL=https://datasheet.ciiva.com/16862/70176037-16862846.pdf?src-supplier=Allied+Electronics, ComponentLink10Description=https://datasheet.ciiva.com/2900/b3u-1110-2900031.pdf?src-supplier=Digi-Key, ComponentLink10URL=https://datasheet.ciiva.com/2900/b3u-1110-2900031.pdf?src-supplier=Digi-Key, Contact Material=Silver, Current Rating=50mA, Depth=2.5mm, Electrical Life=200000Cycles, Height=1.2mm, Illumination Type=Non-Illuminated,Illuminated, Lead Free="Lead Free", Length=4mm, Manufacturer Part Number=B3U-1000P, Max Current Rating=50mA, Mechanical Life=200000Cycles, Mount="Surface Mount", Orientation=Straight, Packaging="Tape and Reel", Pricing 1="1=0,92000, 10=0,79900, 50=0,79900, 100=0,64500, 1000=0,53800, 10000=0,44100 (USD)", REACH SVHC=Unknown, RoHS=Yes, Stock 1=33691, Supplier 1=Mouser, Switch Function=Off-Mom, Switch Travel=0.15mm, Termination=SMD/SMT, Throw Configuration=SPST, Voltage Rating (DC)=12V, Weight=0.000776oz, Width=3mm
S4: "Slide Switch, JS Series, SPDT, Right Angle, SMD, 100 mA ;RoHS Compliant: Yes", Case/Package=100, Contact Current Rating=300mA, Contact Resistance=70mR, Manufacturer="ITT C&K", Max Operating Temperature=85°C, Max Voltage Rating (DC)=6V, Min Operating Temperature=-40°C, Package Quantity=1, Supplier Part Number 1=611-JS102011SAQN, Actuator Length=2mm, Actuator Material=Nylon,Polyamide, Actuator Type=Standard, Category="Slide Switches", ComponentLink1Description=https://datasheet.ciiva.com/1532/js-9dec14-1532400.pdf?src-supplier=Element14, ComponentLink1URL=https://datasheet.ciiva.com/1532/js-9dec14-1532400.pdf?src-supplier=Element14, ComponentLink2Description=https://datasheet.ciiva.com/16442/js102011saqn-16442775.pdf?src-supplier=Future+Electronics, ComponentLink2URL=https://datasheet.ciiva.com/16442/js102011saqn-16442775.pdf?src-supplier=Future+Electronics, ComponentLink3Description=https://datasheet.ciiva.com/5279/js-1nov12-221285-5279564.pdf?src-supplier=Mouser, ComponentLink3URL=https://datasheet.ciiva.com/5279/js-1nov12-221285-5279564.pdf?src-supplier=Mouser, ComponentLink4Description=https://datasheet.ciiva.com/18147/getdatasheetpartid-313004-18147207.pdf?src-supplier=Verical, ComponentLink4URL=https://datasheet.ciiva.com/18147/getdatasheetpartid-313004-18147207.pdf?src-supplier=Verical, ComponentLink5Description=https://datasheet.ciiva.com/2889/js-9dec14-2889130.pdf?src-supplier=Digi-Key, ComponentLink5URL=https://datasheet.ciiva.com/2889/js-9dec14-2889130.pdf?src-supplier=Digi-Key, ComponentLink6Description=https://datasheet.ciiva.com/8625/js-9dec14-8625466.pdf?src-supplier=Avnet, ComponentLink6URL=https://datasheet.ciiva.com/8625/js-9dec14-8625466.pdf?src-supplier=Avnet, ComponentLink7Description=https://datasheet.ciiva.com/2889/js-9dec14-2889131.pdf?src-supplier=Digi-Key, ComponentLink7URL=https://datasheet.ciiva.com/2889/js-9dec14-2889131.pdf?src-supplier=Digi-Key, ComponentLink8Description=https://datasheet.ciiva.com/2889/js-9dec14-2889132.pdf?src-supplier=Digi-Key, ComponentLink8URL=https://datasheet.ciiva.com/2889/js-9dec14-2889132.pdf?src-supplier=Digi-Key, ComponentLink9Description=https://datasheet.ciiva.com/16174/js-3nov11-16174349.pdf?src-supplier=Onlinecomponents.com, ComponentLink9URL=https://datasheet.ciiva.com/16174/js-3nov11-16174349.pdf?src-supplier=Onlinecomponents.com, Contact Material="Copper Alloy,Copper,Silver", Contact Plating=Silver, Current Rating=300mA, Electrical Life=5000Cycles, Housing Material=Nylon, Illumination Type=Non-Illuminated, Lead Free="Lead Free", Length=9mm, Manufacturer Part Number=JS102011SAQN, Max Current Rating=300mA, Mount="Surface Mount", Orientation="Right Angle", Packaging="Tape and Reel", Pricing 1="1=0,51000, 10=0,51000, 50=0,47600, 100=0,46200, 1000=0,31600, 10000=0,29200 (USD)", Radiation Hardening=No, REACH SVHC="No SVHC", RoHS=Yes, Stock 1=8122, Supplier 1=Mouser, Switch Function=On-On, Switch Travel=2mm, Termination="Gull Wing", Throw Configuration=SPDT, Voltage Rating (DC)=6V
T1 T2: library part NET_TIE
U1: "DAC 1-CH Current Steering 10-bit 24-Pin QSOP", Case/Package=QSOP, Manufacturer=Maxim, Max Operating Temperature=85°C, Max Supply Voltage=3.3V, Min Operating Temperature=-40°C, Min Supply Voltage=2.7V, Package Quantity=50, Supplier Part Number 1=2514736, Category="Digital to Analog Converters (DACs)", ComponentLink1Description=https://datasheet.ciiva.com/7657/37859-7657051.pdf?src-supplier=Element14, ComponentLink1URL=https://datasheet.ciiva.com/7657/37859-7657051.pdf?src-supplier=Element14, ComponentLink2Description=https://datasheet.ciiva.com/26802/max5184beeg-26802205.pdf?src-supplier=IIIC, ComponentLink2URL=https://datasheet.ciiva.com/26802/max5184beeg-26802205.pdf?src-supplier=IIIC, ComponentLink3Description=https://datasheet.ciiva.com/1369/max5181-max5184-1369083.pdf?src-supplier=Digi-Key, ComponentLink3URL=https://datasheet.ciiva.com/1369/max5181-max5184-1369083.pdf?src-supplier=Digi-Key, ComponentLink4Description=https://datasheet.ciiva.com/14250/max5181-max5184-14250750.pdf?src-supplier=Avnet, ComponentLink4URL=https://datasheet.ciiva.com/14250/max5181-max5184-14250750.pdf?src-supplier=Avnet, Full Scale Error=40LSB, Integral Nonlinearity (INL)=2LSB, Interface=Parallel, Manufacturer Part Number=MAX5184BEEG+, Mount="Surface Mount", Number of Bits=10, Number of Converters=1, Number of DAC Channels=1, Number of Pins=24, Output Type=Voltage, Packaging=Rail/Tube, Pricing 1="1=4,14000, 10=3,73000, 25=3,57000, 50=3,46000, 100=3,38000, 250=3,31000, 500=3,23000 (EUR)", Radiation Hardening=No, REACH SVHC="No SVHC", Resolution=10b, RoHS=Yes, Settling Time=25us, Stock 1=67, Supplier 1=Farnell, Supply Type=Analog,Digital
U2: "IC OPAMP VFB 400MHZ RRO 8SOIC", Case/Package=SOIC, Input Bias Current=1.3uA, Input Offset Voltage (Vos)=500uV, Manufacturer=Maxim, Max Operating Temperature=85°C, Max Power Dissipation=471mW, Max Supply Voltage=5.5V, Min Operating Temperature=-40°C, Min Supply Voltage=2.7V, Nominal Supply Current=1.6mA, Output Current=75mA, Package Quantity=100, Power Supply Rejection Ratio (PSRR)=77dB, Voltage Gain=80dB, -3db Bandwidth=400MHz, Bandwidth=400MHz, Category="Amplifiers - Op Amps, Buffer, Instrumentation", Common Mode Rejection Ratio=65dB, ComponentLink1Description=https://datasheet.ciiva.com/1819/max4414-max4419-1819941.pdf?src-supplier=Digi-Key, ComponentLink1URL=https://datasheet.ciiva.com/1819/max4414-max4419-1819941.pdf?src-supplier=Digi-Key, Gain Bandwidth Product=400MHz, Manufacturer Part Number=MAX4414ESA+, Mount="Surface Mount", Number of Amplifiers=1, Number of Channels=1, Number of Circuits=1, Number of Pins=8, Operating Supply Current=1.6mA, Output Current per Channel=75mA, Packaging=Rail/Tube, Pricing 1="200=2,46210, 400=2,42730, 600=2,39250, 1000=2,35770, 2000=2,32290, 10000=2,28810, 20000=2,25330 (USD)", Radiation Hardening=No, REACH SVHC=Unknown, RoHS=Yes, RoHS Compliant=Yes, Series=MAX4414, Slew Rate=200V/µs, Stock 1=26813, Supplier 1=Avnet, Supplier Part Number 1=MAX4414ESA+, Supply Current=1.6mA

## Free pads (board coordinates)
  round 5.5 hole 3.3: 3(130.862,79.692) 3(130.862,122.692) 3(162.862,79.692) 3(162.862,122.692)

## Via types
v1: diameter 0.65, hole 0.25, L1 to L4, tented both sides, 52 vias

## Nets (pads, with @x,y where several pads share a name; then routed paths per layer and width w, separated by ;. In a path a pad name is that pad's centre, name@x,y a point inside that pad or via, vN(x,y) a via of type N, cw(c..) or ccw(c..) an arc to the next point about the centre after c; other vN are vias at no path point)
+3.3V: C1.1 C2.1 C3.2 C4.2 C6.1 J1.41 S4.1 U1.5 U1.21 VDD3.3.1 | length 17.3
  L1 w0.254: C6.1 142.647,99.314 v1(143.891,99.314) ; S4.1 145.923,120.654 v1(145.923,118.999) ; U1.21 147.181,109.206 C3.2 149.377,109.27 149.694,109.586 149.479,109.801 v1(149.479,110.236) ; U1.5 147.894,101.122 147.894,100.27 148.676,99.488 148.676,99.288 149.056,98.908 C4.2 151.448,98.895 152.819,98.895 v1(152.832,98.882) ; VDD3.3.1 v1(157.353,85.471) ; J1.41 162.553,107.442 v1(163.195,107.442)
+5V: C5.2 J1.43 U2.7 VDD5.1 | length 34.5
  L1 w0.254: U2.7 150.557,90.043 U2.7@151.009,90.043 ; U2.7@151.009,90.13 U2.7@151.334,90.13 ; U2.7@151.334,90.043 153.023,90.043 C5.2@153.233,90.252 ; C5.2 C5.2@153.276,90.157 ; C5.2@153.282,90.189 153.289,90.196 C5.2@153.276,90.209 ; VDD5.1@153.289,88.392 153.276,88.405 C5.2@153.276,90.157 ; v1(154.051,90.551) 153.39,90.551 153.162,90.323 C5.2@153.233,90.252 ; J1.43 164.566,108.051 v1(164.846,108.331) ; C5.2@153.233,90.252 C5.2@153.276,90.209 ; C5.2@153.233,90.252 153.276,90.296 C5.2@153.276,90.209 ; C5.2@153.276,90.157 C5.2@153.276,90.209
  L3-PW w0.4: v1(154.051,90.551) 154.051,93.853 157.571,97.373 157.571,107.406 158.592,108.427 164.683,108.427 164.778,108.331 v1(164.846,108.331)
AGND: C2.2 C4.1 C5.1 C7.1 J4.1 R2.1 R3.1 R4.1 T1.1 U1.4 U2.4 | length 17.6
  L1 w0.254: 139.827,106.807 139.932,106.912 139.932,107.166 139.954,107.188 T1.1 ; 140.081,94.361 140.081,90.932 143.586,87.427 U2.4 ; 147.181,95.199 U1.4
GND: C1.2 C3.1 J1.10 J1.13 J1.18 J1.28 J1.42 J1.46 J1.47 LED1.1 S1.2 S2.2 S3.2 S4.3 T1.2 T2.2 U1.7 U1.10 U1.22 | length 20.3
  L1 w0.254: T2.2@129.33,119.38 v1(129.921,119.38) ; v1(139.192,108.858) T1.2 ; v1(139.954,109.493) T1.2 ; v1(140.716,108.858) T1.2 ; v1(140.843,118.999) 140.843,120.654 S4.3 ; U1.22 146.552,106.476 146.547,106.481 v1(146.547,107.654) ; C3.1 146.863,112.624 147.193,112.953 v1(147.193,113.411) ; v1(148.261,115.899) LED1.1 ; U1.7 149.164,101.278 149.164,102.251 149.289,102.376 v1(149.289,102.415) ; C1.2 149.534,112.226 149.534,112.919 v1(149.552,112.937) ; U1.10 150.997,101.194 150.997,99.955 v1(151.003,99.949) ; S2.2 153.089,112.903 153.123,112.937 153.139,112.921 v1(153.919,112.921) ; S3.2 153.009,117.727 v1(153.923,117.727) ; S1.2 153.001,122.389 v1(153.919,122.389) ; v1(158.91,107.569) 159.017,107.569 159.176,107.728 159.645,107.728 J1.42 ; v1(159.022,103.576) 159.035,103.563 159.655,103.563 J1.28 ; J1.10 159.688,98.171 160.421,98.171 160.548,98.298 v1(160.655,98.298) ; J1.18 159.691,100.574 160.137,100.574 160.147,100.584 v1(160.528,100.584) ; J1.46 162.307,94.713 163.097,94.713 v1(163.195,94.615) ; J1.47 162.292,109.375 163.09,109.375 v1(163.114,109.398) ; J1.13 162.567,99.028 163.367,99.028 v1(163.392,99.003)
LEDA2: J1.8 R7.1 | length 4.7
  L1 w0.254: J1.8 159.691,97.528 160.084,97.528 160.32,97.292 160.32,94.555 160.32,93.345 R7.1@160.317,93.342
LEDC2: J1.7 R7.2 | length 5.8
  L1 w0.254: R7.2@161.516,93.345 161.516,93.296 161.467,93.345 161.467,96.586 162.109,97.228 162.727,97.228 162.773,97.274 163.401,97.274 163.536,97.409 v1(163.576,97.409)
NetC6_2: C6.2 U1.1 | length 5
  L1 w0.254: C6.2@142.025,102.33 142.563,102.33 C6.2 145.127,102.388 145.276,102.239 U1.1 ; C6.2@142.025,102.422 142.341,102.738 142.341,102.87
NetC7_2: C7.2 U1.24 | length 2.9
  L1 w0.254: C7.2@143.586,105.125 143.598,105.136 145.127,105.136 145.276,105.285 U1.24
NetCVBS_1: CVBS.1 J4.2 R1.2 | length 8.8
  L1 w0.254: J4.2 136.526,90.127 138.485,90.127 R1.2
NetLED1_2: LED1.2 R6.1 | length 1.7
  L1 w0.254: R6.1 144.903,116.975 146.625,116.975 LED1.2
NetR1_1: R1.1 R5.2 U2.6 | length 12.4
  L1 w0.254: R1.1 146.812,85.471 149.626,88.285 149.626,88.529 149.794,88.697 U2.6@149.881,88.697 ; R5.2 148.959,89.661 149.623,88.996 149.623,88.865 149.791,88.697 150.292,88.697 U2.6
NetR2_2: R2.2 U1.23 | length 5.1
  L1 w0.254: R2.2 143.129,106.68 144.066,107.617 145.735,107.617 145.883,107.468 145.883,106.497 U1.23
NetR3_2: R3.2 R5.1 U2.2 | length 5.8
  L1 w0.254: U2.2 146.221,89.967 147.32,91.066 R5.1@147.32,93.218 ; R3.2 147.447,93.357 R5.1
NetR4_2: R4.2 U1.2 U2.3 | length 15.2
  L1 w0.254: U2.3 144.118,88.697 143.51,89.305 143.51,94.107 145.911,96.508 U1.2
NetR6_2: R6.2 S4.2 U1.6 | length 24.3
  L1 w0.254: S4.2 ccw(c143.69,120.387) 143.256,120.387 v1(143.256,119.126) 143.256,118.251 143.256,116.975 143.387,116.975 R6.2 ; U1.6 148.457,101.206 148.457,102.483 v1(148.463,102.489)
  L4 w0.254: v1(143.256,119.126) 143.256,107.188 147.955,102.489 v1(148.463,102.489)
P10: J1.25 S1.1 | length 23.1
  L1 w0.254: S1.1 157.25,122.404 161.417,118.237 161.417,103.366 162.109,102.674 162.521,102.674 J1.25
P11: J1.24 S2.1 | length 13.6
  L1 w0.254: S2.1 157.504,113.006 160.401,110.109 160.401,102.523 160.252,102.374 159.691,102.374 J1.24
P12: J1.23 S3.1 | length 19.3
  L1 w0.254: S3.1 157.885,117.705 160.909,114.681 160.909,103.232 162.067,102.074 162.521,102.074 J1.23
SG: J1.3 J1.4 J2.1 J3.1 SG.1 | length 6.3
  L1 w0.254: v1(158.824,96.32) 158.839,96.336 159.653,96.336 J1.4 ; J1.3 162.549,96.056 163.327,96.056 v1(163.334,96.049)
  L4 w0.254: v1(158.824,96.32) 161.04,96.32 161.311,96.049 v1(163.334,96.049)
SHD: pad.3 T2.1 | length 118
  L1 w0.5: T2.1 T2.1@128.362,119.38 ; pad.3@130.862,122.692 130.055,121.885 128.362,121.885 T2.1@128.362,119.38 ; pad.3@131.205,123.499 131.669,123.499 131.669,125.192 161.701,125.192 162.862,124.031 pad.3@162.862,122.692 ; pad.3@162.862,79.692 161.905,78.735 161.905,77.196 161.901,77.192 131.596,77.192 131.596,78.958 130.862,79.692 129.509,79.692 128.362,80.839 T2.1@128.362,119.38
SPLO: J1.1 J1.2 J2.2 SPLO.1 | length 7
  L1 w0.254: v1(158.872,95.504) 159.096,95.728 159.645,95.728 J1.2 ; J1.1 162.561,95.434 163.448,95.434 163.595,95.286 v1(163.702,95.286)
  L4 w0.254: v1(158.872,95.504) 159.09,95.286 v1(163.702,95.286)
SPRO: J1.5 J1.6 J3.2 SPRO.1 | length 8.3
  L1 w0.254: v1@158.623,97.041 158.703,96.961 159.658,96.961 J1.6 ; v1@158.623,97.042 v1(158.623,97.155) ; J1.5 163.961,96.651 v1(164.02,96.711)
  L4 w0.254: v1(158.623,97.155) 160.775,97.155 161.156,96.774 163.957,96.774 v1(164.02,96.711)
TVCLK: J1.26 TVCLK.1 U1.9 | length 11.4
  L1 w0.254: U1.9 150.356,103.102 150.505,103.251 153.861,103.251 154.16,102.951 J1.26
TVDATA0: J1.37 TVD0.1 U1.11 | length 20.8
  L1 w0.254: U1.11 151.632,101.206 151.632,102.395 v1(151.638,102.401) ; J1.37 163.655,106.251 v1(163.703,106.299)
  L4 w0.254: v1(151.638,102.401) 152.439,101.6 164.338,101.6 164.846,102.108 164.846,105.156 v1(163.703,106.299)
TVDATA1: J1.36 TVD1.1 U1.12 | length 22.8
  L1 w0.254: U1.12 152.339,101.278 152.339,102.196 152.527,102.384 v1(152.527,102.424) ; v1(158.75,105.824) 158.857,105.824 158.962,105.929 159.646,105.929 J1.36
  L4 w0.254: v1(152.527,102.424) 152.527,102.743 152.146,103.124 TVD1.1 148.336,103.124 146.271,105.189 146.271,105.399 146.79,105.918 158.656,105.918 v1(158.75,105.824)
TVDATA2: J1.35 TVD2.1 U1.13 | length 17.9
  L1 w0.254: v1(152.232,107.737) 152.261,107.708 U1.13 ; J1.35 164.314,105.651 164.962,106.299 v1(164.973,106.299)
  L4 w0.254: v1(152.232,107.737) 152.699,108.204 TVD2.1 163.411,108.204 164.899,106.716 164.899,106.373 v1(164.973,106.299)
TVDATA3: J1.34 TVD3.1 U1.14 | length 9.5
  L1 w0.254: U1.14 151.704,106.392 151.704,105.64 152.122,105.222 154.94,105.222 ; TVD3.1 154.94,105.222 ; J1.34 159.493,105.351 159.364,105.222 154.94,105.222
TVDATA4: J1.33 TVD4.1 U1.15 | length 15.8
  L1 w0.254: U1.15 151.01,106.489 151.01,107.476 151.257,107.723 v1(151.257,107.773) ; J1.33 162.566,105.029 v1(163.322,105.029)
  L4 w0.254: v1(151.257,107.773) 151.307,107.773 152.113,106.967 155.321,106.967 ; TVD4.1 155.321,106.967 ; v1(163.322,105.029) 162.306,105.029 160.368,106.967 155.321,106.967
TVDATA5: J1.32 TVD5.1 U1.16 | length 12.7
  L1 w0.254: TVD5.1@150.434,108.458 150.434,106.548 U1.16 150.368,106.458 150.368,105.41 151.027,104.751 J1.32
TVDATA6: J1.31 TVD6.1 U1.17 | length 18.1
  L1 w0.254: v1(149.702,107.699) 149.727,107.674 149.727,106.476 U1.17 ; J1.31 162.546,104.453 163.047,104.453 163.073,104.427 163.797,104.427 v1(163.83,104.394)
  L4 w0.254: v1(149.702,107.699) 149.702,107.594 150.492,106.804 TVD6.1 150.876,106.426 160.02,106.426 162.019,104.427 163.797,104.427 v1(163.83,104.394)
TVDATA7: J1.30 TVD7.1 U1.18 | length 12.5
  L1 w0.254: U1.18 149.098,106.458 149.098,104.902 149.86,104.14 155.326,104.14 TVD7.1 155.439,104.173 155.7,104.173 155.705,104.178 159.346,104.178 159.35,104.174 159.47,104.174 159.493,104.151 J1.30
TVDATA8: J1.29 TVD8.1 U1.19 | length 19.2
  L1 w0.254: U1.19 148.478,106.442 v1(148.478,104.917) ; J1.29 162.531,103.864 163.508,103.864 163.868,103.505 v1(163.957,103.505)
  L4 w0.254: v1(148.478,104.917) 158.445,104.917 158.51,104.853 158.926,104.853 160.188,103.591 163.871,103.591 v1(163.957,103.505)
TVDATA9: J1.27 TVD9.1 U1.20 | length 19.5
  L1 w0.254: v1(147.447,105.029) 147.816,105.398 U1.20 ; J1.27 163.08,103.251 v1(163.419,102.912)
  L4 w0.254: v1(147.447,105.029) 148.209,104.267 157.48,104.267 158.835,102.912 160.02,102.912 v1(163.419,102.912)
pads on no net: J1.9 J1.11 J1.12 J1.14 J1.15 J1.16 J1.17 J1.19 J1.20 J1.21 J1.22 J1.38 J1.39 J1.40 J1.44 J1.45 S4. U1.3 U1.8 U2.1 U2.5 U2.8

## Polygon pours and split planes (outlines as drawn)
SPLO on L4 "SPLO_L04_P004" (solid, pour order 4): 134.493,101.981 134.493,99.568 142.748,91.313 155.829,91.313 159.639,95.123 159.639,95.818 158.302,95.818 156.21,93.726 144.018,93.726 138.049,99.695 138.049,101.981